# Altium PCB CarteRelais.PcbDoc
Units mil, origin at the board's own origin, x right, y up, seen from the top; angles counter-clockwise.
Board outline 2310.03 x 2360.03 mil, 2 copper layers (Top Layer, Bottom Layer); 17 components, 14 nets, 62 pads, 0 vias.
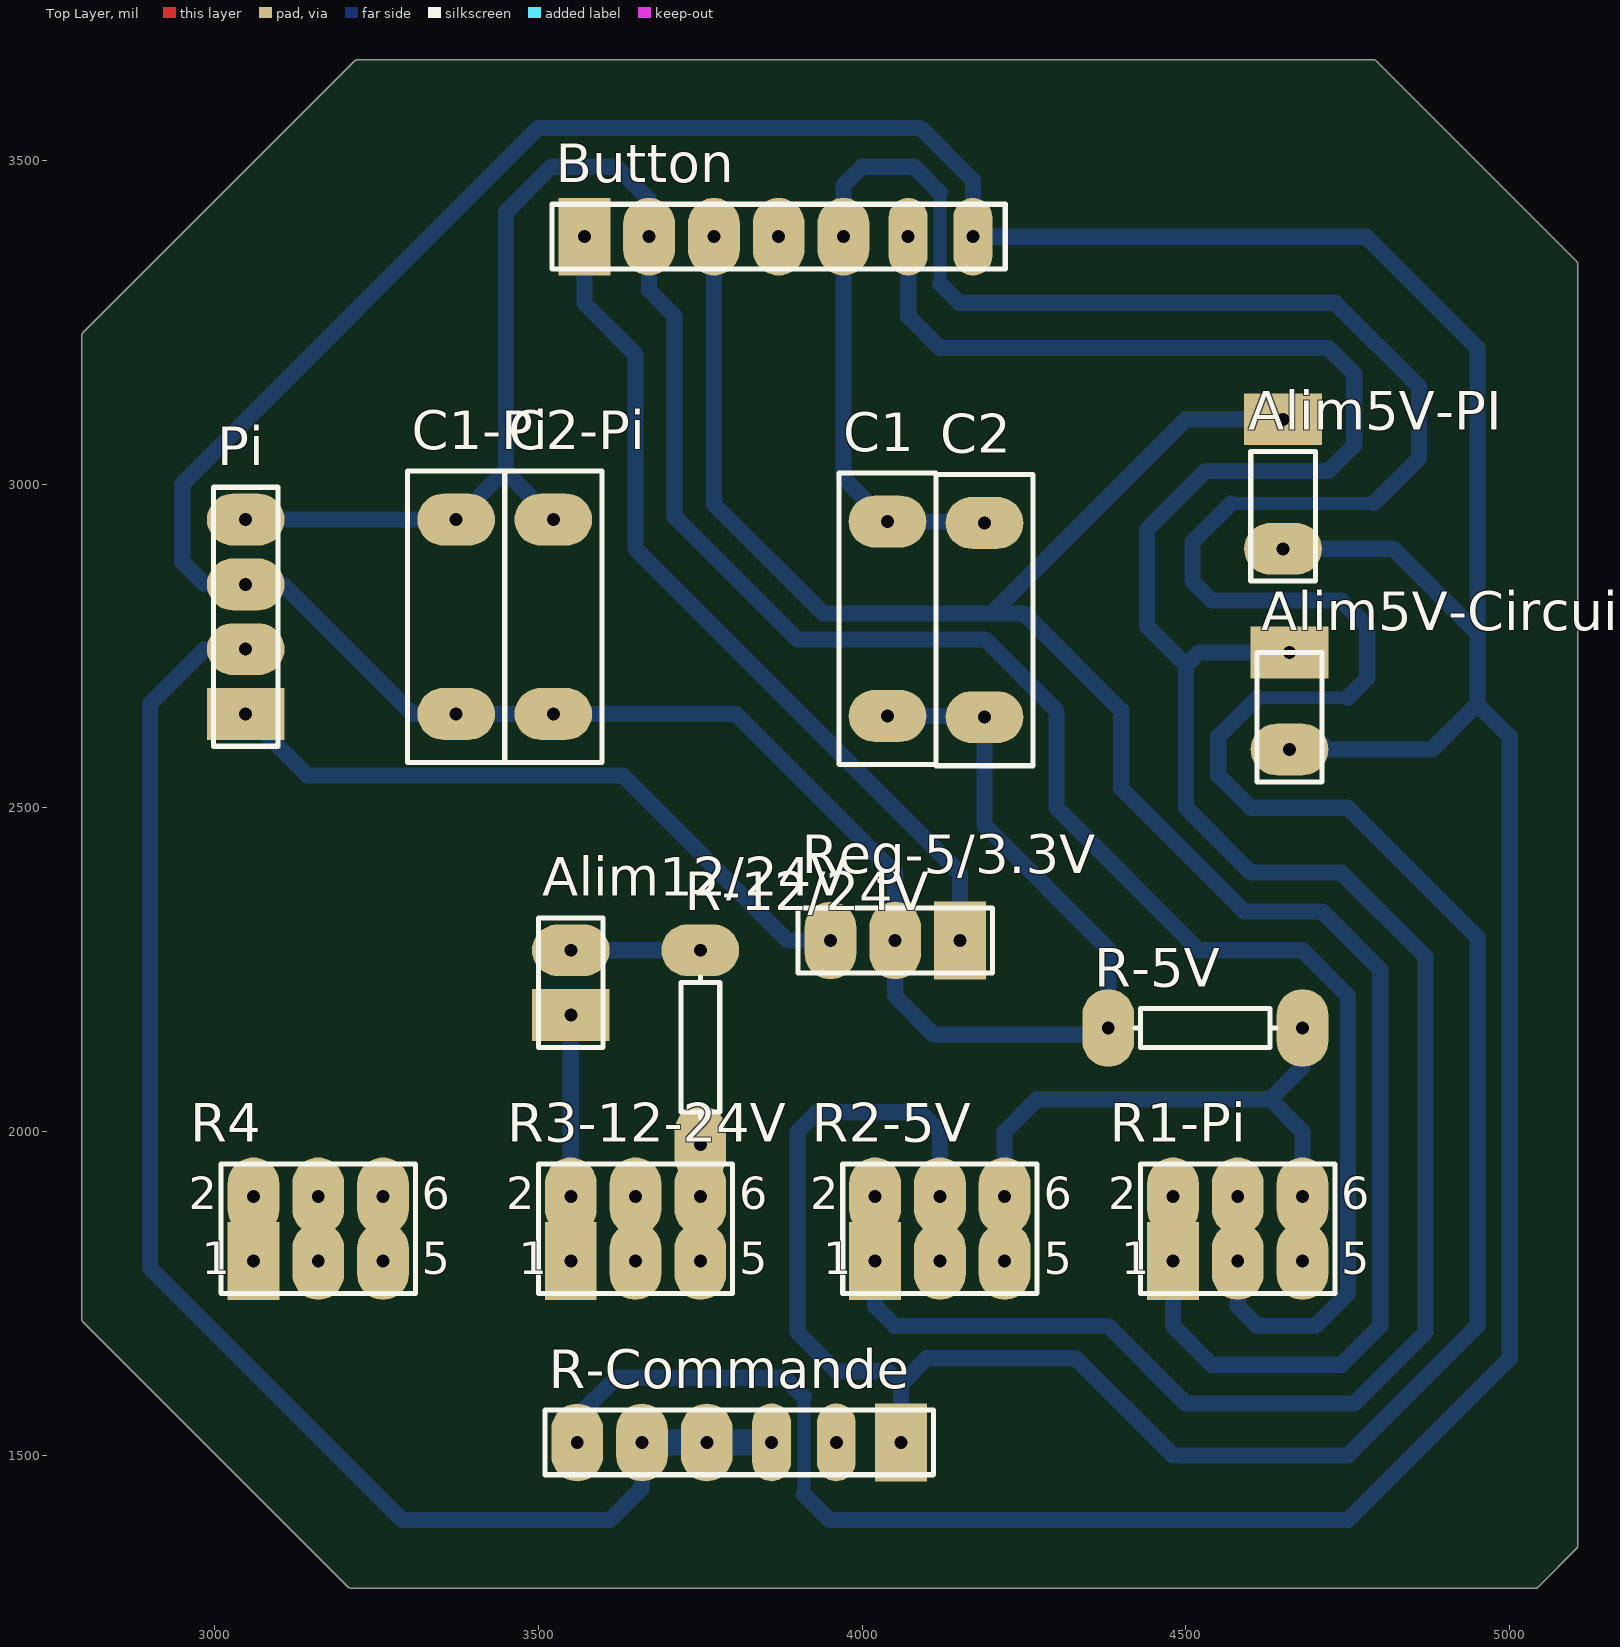
[diagram p0: Top Layer view]
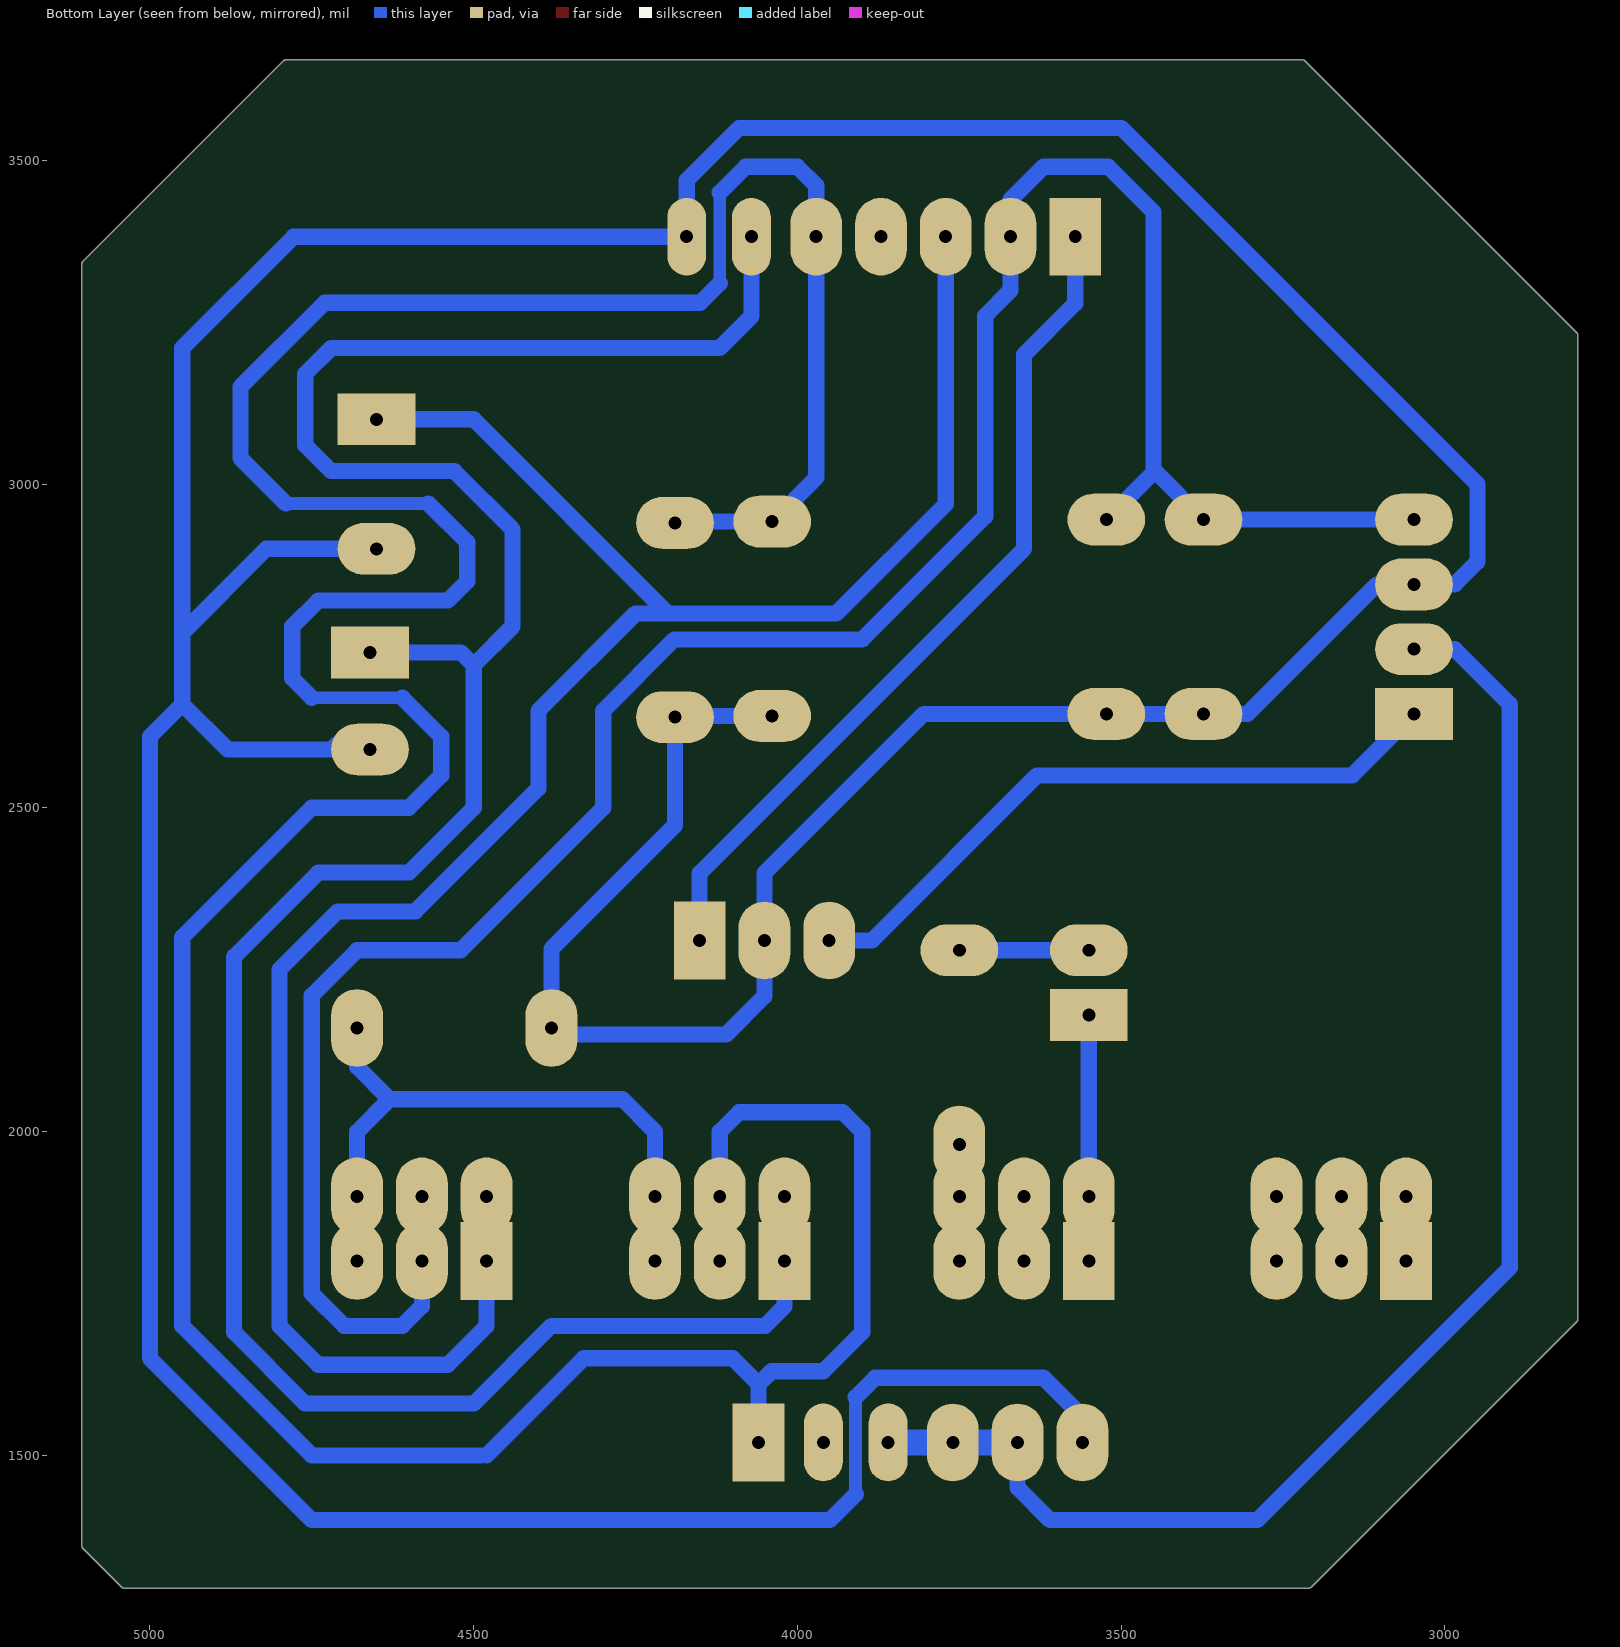
[diagram p1: Bottom Layer view, seen from below]

## Layer stack, top to bottom
Top Solder: solder mask 0.4, Solder Resist, Dk 3.5
Top Layer: signal copper 1.4
Dielectric 1: dielectric 12.6, FR-4, Dk 4.8
Bottom Layer: signal copper 1.4
Bottom Solder: solder mask 0.4, Solder Resist, Dk 3.5

## Board outline
2796.45,1706.45 3206.45,1296.45 3206.44,1296.47 ccw(c3210,1300) 3210,1294.98 5040,1294.98 ccw(c5040,1300) 5043.56,1296.47 5043.55,1296.45 5103.55,1356.45 5103.53,1356.44 ccw(c5100,1360) 5105.02,1360 5105.02,3340 ccw(c5100,3340) 5103.53,3343.56 5103.55,3343.55 4793.55,3653.55 4793.56,3653.53 ccw(c4790,3650) 4790,3655.01 3220,3655.01 ccw(c3220,3650) 3216.44,3653.53 3216.45,3653.55 2796.45,3233.55 2796.47,3233.56 ccw(c2800,3230) 2794.99,3230 2794.99,1710 ccw(c2800,1710)

## Design rules (kind name [scope] priority, off if disabled: settings)
AssemblyTestPointUsage [All] p1 off:
AssemblyTestpoint [All] p1 off: testpointundercomponent=TRUE minsize=40 maxsize=100 preferedsize=60 minholesize=0 maxholesize=40 preferedholesize=32 testpointgrid=1 usegrid=TRUE gridtolerance=0.01 allowsidetop=TRUE allowsidebottom=TRUE
Clearance [All] p1 off: gap=10
ComponentClearance [All] p1 off: gap=10 collisioncheckmode=3 verticalgap=10 showdistances=FALSE
DiffPairsRouting [All] p1 off: maxlimit=10 minlimit=10 mostfreqgap=10 toplayer_minwidth=15 toplayer_maxwidth=15 toplayer_prefwidth=15 bottomlayer_minwidth=15 bottomlayer_maxwidth=15 bottomlayer_prefwidth=15 maxuncoupledlength=500
FabricationTestPointUsage [All] p1 off: valid=0 allowmultiple=FALSE
FabricationTestpoint [All] p1 off: side=3 testpointundercomponent=TRUE minsize=40 maxsize=100 preferedsize=60 minholesize=0 maxholesize=40 preferedholesize=32 testpointgrid=1 allowsidetop=TRUE allowsidebottom=TRUE usegrid=TRUE gridtolerance=0.01
FanoutControl Fanout_BGA [IsBGA] p1 off: bgadir=Out bgaviamode=Centered fanoutstyle=Auto fanoutdirection=Alternating viagrid=1 // Fanout_BGA (Default Rule)
FanoutControl Fanout_LCC [IsLCC] p2 off: bgadir=Out bgaviamode=Centered fanoutstyle=Auto fanoutdirection=Alternating viagrid=1 // Fanout_LCC (Default Rule)
FanoutControl Fanout_SOIC [IsSOIC] p3 off: bgadir=Out bgaviamode=Centered fanoutstyle=Auto fanoutdirection=Alternating viagrid=1 // Fanout_SOIC (Default Rule)
FanoutControl Fanout_Small [(CompPinCount < 5)] p4 off: bgadir=Out bgaviamode=Centered fanoutstyle=Auto fanoutdirection=OutThenIn viagrid=1 // Fanout_Small (Default Rule)
FanoutControl Fanout_Default [All] p5 off: bgadir=Out bgaviamode=Centered fanoutstyle=Auto fanoutdirection=Alternating viagrid=1 // Fanout_Default (Default Rule)
Height [All] p1 off: minheight=0 maxheight=1000 prefheight=500
HoleSize [All] p1 off: absolutevalues=TRUE maxlimit=100 minlimit=1 maxpercent=80.000 minpercent=20.000
HoleToHoleClearance [All] p1 off: gap=10 allowstackedmicrovias=TRUE
LayerPairs [All] p1 off: enforce=TRUE
MinimumSolderMaskSliver [All] p1 off: minsoldermaskwidth=10
NetAntennae [All] p1 off: netantennaetolerance=0
PasteMaskExpansion [All] p1 off: expansion=0
PlaneClearance [All] p1 off: clearance=20
PlaneConnect [All] p1 off: planeconnectstyle=Relief reliefexpansion=20 reliefentries=4 reliefconductorwidth=10 reliefairgap=10
PolygonConnect [All] p1 off: connectstyle=Relief reliefconductorwidth=10 reliefentries=4 polygonreliefangle="90 Angle" airgapwidth=10
RoomDefinition CarteRelais [InComponentClass('CarteRelais')] p1 off: confinementstyle=ConfineIn formatcopy=TRUE lockcomponents=FALSE outline 7045,1060 13780,1060 13780,1880 7045,1880
RoutingCorners [All] p1 off: cornerstyle=45-Degree minsetback=100 maxsetback=100
RoutingLayers [All] p1 off: top layer_v5=TRUE bottom layer_v5=TRUE
RoutingPriority [All] p1 off: routingpriority=0
RoutingTopology [All] p1 off: topology=Shortest
RoutingVias [All] p1 off: holewidth=28 width=50 viastyle="Through Hole" minholewidth=28 minwidth=50 maxholewidth=28 maxwidth=50
ShortCircuit [All] p1 off: allowed=FALSE
SilkToBoardRegionClearance [All] p1 off:
SilkToSilkClearance [All] p1 off: silktosilkclearance=10
SilkToSolderMaskClearance [IsPad] p1 off: minsilkscreentomaskgap=10 clearancetoexposedcopper=TRUE
SolderMaskExpansion [All] p1 off: expansion=4
UnRoutedNet [All] p1 off:
Width [All] p1: maxlimit=25 minlimit=25 preferedwidth=25

## Classes and differential pairs
component class CarteRelais: Alim5V-Circuit Alim5V-PI Alim12/24V Button C1 C1-Pi C2 C2-Pi Pi R1-Pi R2-5V R3-12-24V R4 R-5V R-Commande Reg-5/3.3V

## Components (designator, comment, footprint, x,y, rotation, side; value= is the part's Value field where it differs from the comment)
Alim5V-Circuit "Header 2" HDR1X2#1 4660,2690 r270 top
Alim5V-PI "Header 2" HDR1X2#2 4650,3000 r270 top
Alim12/24V "Header 2" HDR1X2#3 3550,2180 r90 top
Button "Header 7" HDR1X7 3571,3382 r0 top
C1 "Cap" RAD-0.3 4039,2792 r90 top
C1-Pi "Cap" RAD-0.3 3373,2795 r90 top
C2 "Cap" RAD-0.3 4189,2790 r90 top
C2-Pi "Cap" RAD-0.3 3523,2795 r90 top
Pi "Header 4" HDR1X4 3048,2645 r90 top
R1-Pi "Header 3X2" HDR2X3 4480,1800 r0 top
R2-5V "Header 3X2" HDR2X3 4020,1800 r0 top
R3-12-24V "Header 3X2" HDR2X3 3550,1800 r0 top
R4 "Header 3X2" HDR2X3 3060,1800 r0 top
R-5V "Res1" AXIAL-0.3#1 4530,2160 r180 top
R-12/24V "Res1" AXIAL-0.3#2 3750,2130 r90 top
R-Commande "Header 6" HDR1X6 4060,1520 r180 top
Reg-5/3.3V "Header 3" HDR1X3 4151,2295 r180 top

## Footprints (in the part's own frame and the unit in brackets; to place one, negate y for a bottom-side part, rotate by r counter-clockwise, add the part's x,y. Pads: shape width x height; smd on the part's side, far side on the other; paste and mask are expansions set on the pad)
AXIAL-0.3#1 [mil] "Axial Device, Thru-Hole; 2 Leads; 0.3 in Pin Spacing"
  oval 80x120 hole 20: 1(-150,0) 2(150,0)
  silkscreen extent -109,-30 109,30
AXIAL-0.3#2 [mil] "Axial Device, Thru-Hole; 2 Leads; 0.3 in Pin Spacing"
  oval 120x80 hole 20: 1(-150,0)
  oval 80x120 hole 20: 2(150,0)
  silkscreen extent -109,-30 109,30
HDR1X2#1 [mil] "Connector; Header; 2 Position"
  rect 80x120 hole 20: 1(-50,0)
  oval 80x120 hole 20: 2(100,0)
  silkscreen extent -50,-50 150,50
HDR1X2#2 [mil] "Connector; Header; 2 Position"
  rect 80x120 hole 20: 1(-100,0)
  oval 80x120 hole 20: 2(100,0)
  silkscreen extent -50,-50 150,50
HDR1X2#3 [mil] "Connector; Header; 2 Position"
  rect 80x120 hole 20: 1(0,0)
  oval 80x120 hole 20: 2(100,0)
  silkscreen extent -50,-50 150,50
HDR1X3 [mil] "Connector; Header; 3 Position"
  rect 80x120 hole 20: 1(0,0)
  oval 80x120 hole 20: 2(100,0) 3(200,0)
  silkscreen extent -50,-50 250,50
HDR1X4 [mil] "Connector; Header; 4 Position"
  rect 80x120 hole 20: 1(0,0)
  oval 80x120 hole 20: 2(100,0) 3(200,0) 4(300,0)
  silkscreen extent -50,-50 350,50
HDR1X6 [mil] "Connector; Header; 6 Position"
  rect 80x120 hole 20: 1(0,0)
  oval 60x120 hole 20: 2(100,0) 3(200,0)
  oval 80x120 hole 20: 4(300,0) 5(400,0) 6(500,0)
  silkscreen extent -50,-50 550,50
HDR1X7 [mil] "Connector; Header; 7 Position"
  rect 80x120 hole 20: 1(0,0)
  oval 80x120 hole 20: 2(100,0) 3(200,0) 4(300,0) 5(400,0)
  oval 60x120 hole 20: 6(500,0) 7(600,0)
  silkscreen extent -50,-50 650,50
HDR2X3 [mil] "Connector; Header; 3x2 Position"
  rect 80x120 hole 20: 1(0,0)
  oval 80x120 hole 20: 2(0,100) 3(100,0) 4(100,100) 5(200,0) 6(200,100)
  silkscreen extent -50,-50 250,150
RAD-0.3 [mil] "Radial Cap, Thru-Hole; 2 Leads; 0.3 in Pin Spacing"
  oval 80x120 hole 20: 1(-150,0) 2(150,0)
  silkscreen extent -225,-75 225,75

## Part data
Alim5V-Circuit Alim5V-PI Alim12/24V: "Header, 2-Pin"
Button: "Header, 7-Pin"
C1 C1-Pi C2 C2-Pi: "Capacitor"
Pi: "Header, 4-Pin"
R1-Pi R2-5V R3-12-24V R4: "Header, 3-Pin, Dual row"
R-5V R-12/24V: "Resistor"
R-Commande: "Header, 6-Pin"
Reg-5/3.3V: "Header, 3-Pin"

## Nets (pads, with @x,y where several pads share a name; then routed paths per layer and width w, separated by ;. In a path a pad name is that pad's centre, name@x,y a point inside that pad or via, vN(x,y) a via of type N, cw(c..) or ccw(c..) an arc to the next point about the centre after c; other vN are vias at no path point)
3.3V: Pi.1 Reg-5/3.3V.3 | length 1048
  Bottom Layer w25: Pi.1 3143,2550 3630,2550 3885,2295 Reg-5/3.3V.3
5V: Alim5V-PI.1 Button.3 R1-Pi.2 | length 3506.1
  Bottom Layer w25: Button.3 3771,2969 3940,2800 4250,2800 4400,2650 4400,2530 4590,2340 4710,2340 4800,2250 4800,1700 4740,1640 4540,1640 4480,1700 R1-Pi.2 ; 4200,2800 4500,3100 Alim5V-PI.1@4652,3100
5V-2: Alim5V-Circuit.1 Button.6 R2-5V.2 | length 4149.5
  Bottom Layer w25: R2-5V.2 3995,1875 4020,1850 4020,1730 4050,1700 4380,1700 4500,1580 4760,1580 4870,1690 4870,2270 4740,2400 4600,2400 4500,2500 4500,2720 ; Button.6 4071,3259 4120,3210 4720,3210 4760,3170 4760,3060 4720,3020 4530,3020 4440,2930 4440,2780 4500,2720 ; Alim5V-Circuit.1 4520,2740 4500,2720
5V-PI: Button.2 C1-Pi.2 C2-Pi.2 Pi.4 R1-Pi.4 | length 3981.3
  Bottom Layer w25: Pi.4 C1-Pi.2 3446,3018 3450,3018 ; C2-Pi.2 3450,3018 ; R1-Pi.4 4580,1730 4610,1700 4700,1700 4750,1750 4750,2210 4680,2280 4520,2280 4300,2500 4300,2650 4190,2760 3900,2760 3710,2950 3710,3260 3671,3299 Button.2 3671,3439 3620,3490 3520,3490 3450,3420 3450,3018
5V-REG: Button.1 Reg-5/3.3V.1 | length 1327.2
  Bottom Layer w25: Button.1 3571,3279 3650,3200 3650,2900 4151,2399 Reg-5/3.3V.1
12/24V: Alim12/24V.1 R3-12-24V.2 | length 280
  Bottom Layer w25: R3-12-24V.2 Alim12/24V.1
CIRCUIT-5V: Button.5 C1.2 C2.2 R2-5V.4 R-Commande.1 | length 6182.2
  Bottom Layer w20: 4120,3310 4120,3450 ; 4570,2970 4790,2970 ; 4610,2670 4750,2670
  Bottom Layer w25: R-Commande.1 4060,1610 ; R2-5V.4 4120,2000 4090,2030 3930,2030 3900,2000 3900,1690 3960,1630 4040,1630 4060,1610 ; 4120,3310 4150,3280 4730,3280 4860,3150 4860,3040 4790,2970 ; 4120,3450 4080,3490 4000,3490 3971,3461 Button.5 3971,3010 C1.2 C2.2@4187,2942 ; 4480,1500 4330,1650 4100,1650 4060,1610 ; 4490,1500 4750,1500 4950,1700 4950,2300 4750,2500 4600,2500 4550,2550 4550,2610 4610,2670 ; 4570,2970 4510,2910 4510,2850 4540,2820 4740,2820 4780,2780 4780,2700 4750,2670
CIRCUIT-12/24V: R3-12-24V.4
GND-5V: R1-Pi.6 R2-5V.6 R-5V.1 | length 833.4
  Bottom Layer w25: R2-5V.6 4220,2000 4270,2050 4630,2050 ; R1-Pi.6 4680,2000 4630,2050 ; R-5V.1@4683,2160 4680,2157 4680,2100 4630,2050
GND-12/24V: R3-12-24V.6 R-12/24V.1
GND-ALIM-5V: Alim5V-Circuit.2 Alim5V-PI.2 Button.7 C1-Pi.1 C1.1 C2-Pi.1 C2.1 Pi.3 R-5V.2 R-Commande.6 Reg-5/3.3V.2 | length 9105.6
  Bottom Layer w20: 3910,1440 3910,1590
  Bottom Layer w25: R-Commande.6 3560,1560 3620,1620 3880,1620 3910,1590 ; 3910,1440 3950,1400 4750,1400 5000,1650 5000,2610 4950,2660 ; C1.1 4187,2642 C2.1 4189,2473 4380,2282 R-5V.2 4370,2150 4110,2150 4051,2209 Reg-5/3.3V.2 4051,2399 3805,2645 C2-Pi.1 C1-Pi.1 3305,2645 3105,2845 Pi.3 2985,2845 2950,2880 2950,3000 3500,3550 4090,3550 4171,3469 Button.7 4778,3382 4950,3210 4950,2770 ; Alim5V-PI.2@4652,2900 4820,2900 4950,2770 ; Alim5V-Circuit.2@4699,2610 4719,2590 4880,2590 4950,2660 ; 4950,2660 4950,2770
GND-ALIM-12/24V: Alim12/24V.2 R-12/24V.2 | length 200
  Bottom Layer w25: Alim12/24V.2 R-12/24V.2
IN1: Pi.2 R-Commande.3 R-Commande.4 R-Commande.5 | length 2265.5
  Bottom Layer w25: Pi.2 2985,2745 2900,2660 2900,1790 3290,1400 3610,1400 3660,1450 R-Commande.5
  Bottom Layer w40: R-Commande.5 R-Commande.4 R-Commande.3
IN4: R-Commande.2
pads on no net: Button.4 R1-Pi.1 R1-Pi.3 R1-Pi.5 R2-5V.1 R2-5V.3 R2-5V.5 R3-12-24V.1 R3-12-24V.3 R3-12-24V.5 R4.1 R4.2 R4.3 R4.4 R4.5 R4.6

## Silkscreen, mask and mechanical layers (free items; w line width, h text height)
Mechanical 1:
  lines w10: 2800,2460 2800,3230 3220,3650 4790,3650 5100,3340 5100,1360 5040,1300 3210,1300 2800,1710 2800,2470

## Text inside footprints (layer, text, board x,y; h text height)
R1-Pi: Top Overlay "1" at 4400,1780 h50; Top Overlay "2" at 4380,1880 h50; Top Overlay "5" at 4740,1780 h50; Top Overlay "6" at 4740,1880 h50
R2-5V: Top Overlay "1" at 3940,1780 h50; Top Overlay "2" at 3920,1880 h50; Top Overlay "5" at 4280,1780 h50; Top Overlay "6" at 4280,1880 h50
R3-12-24V: Top Overlay "1" at 3470,1780 h50; Top Overlay "2" at 3450,1880 h50; Top Overlay "5" at 3810,1780 h50; Top Overlay "6" at 3810,1880 h50
R4: Top Overlay "1" at 2980,1780 h50; Top Overlay "2" at 2960,1880 h50; Top Overlay "5" at 3320,1780 h50; Top Overlay "6" at 3320,1880 h50